# Altium PCB Bus_and_display (1).PcbDoc
Units mm, origin at the board's own origin, x right, y up, seen from the top; angles counter-clockwise.
Board outline 55.88 x 73.79 mm, 2 copper layers (Top Layer, Bottom Layer); 11 components, 7 nets, 112 pads, 3 vias.
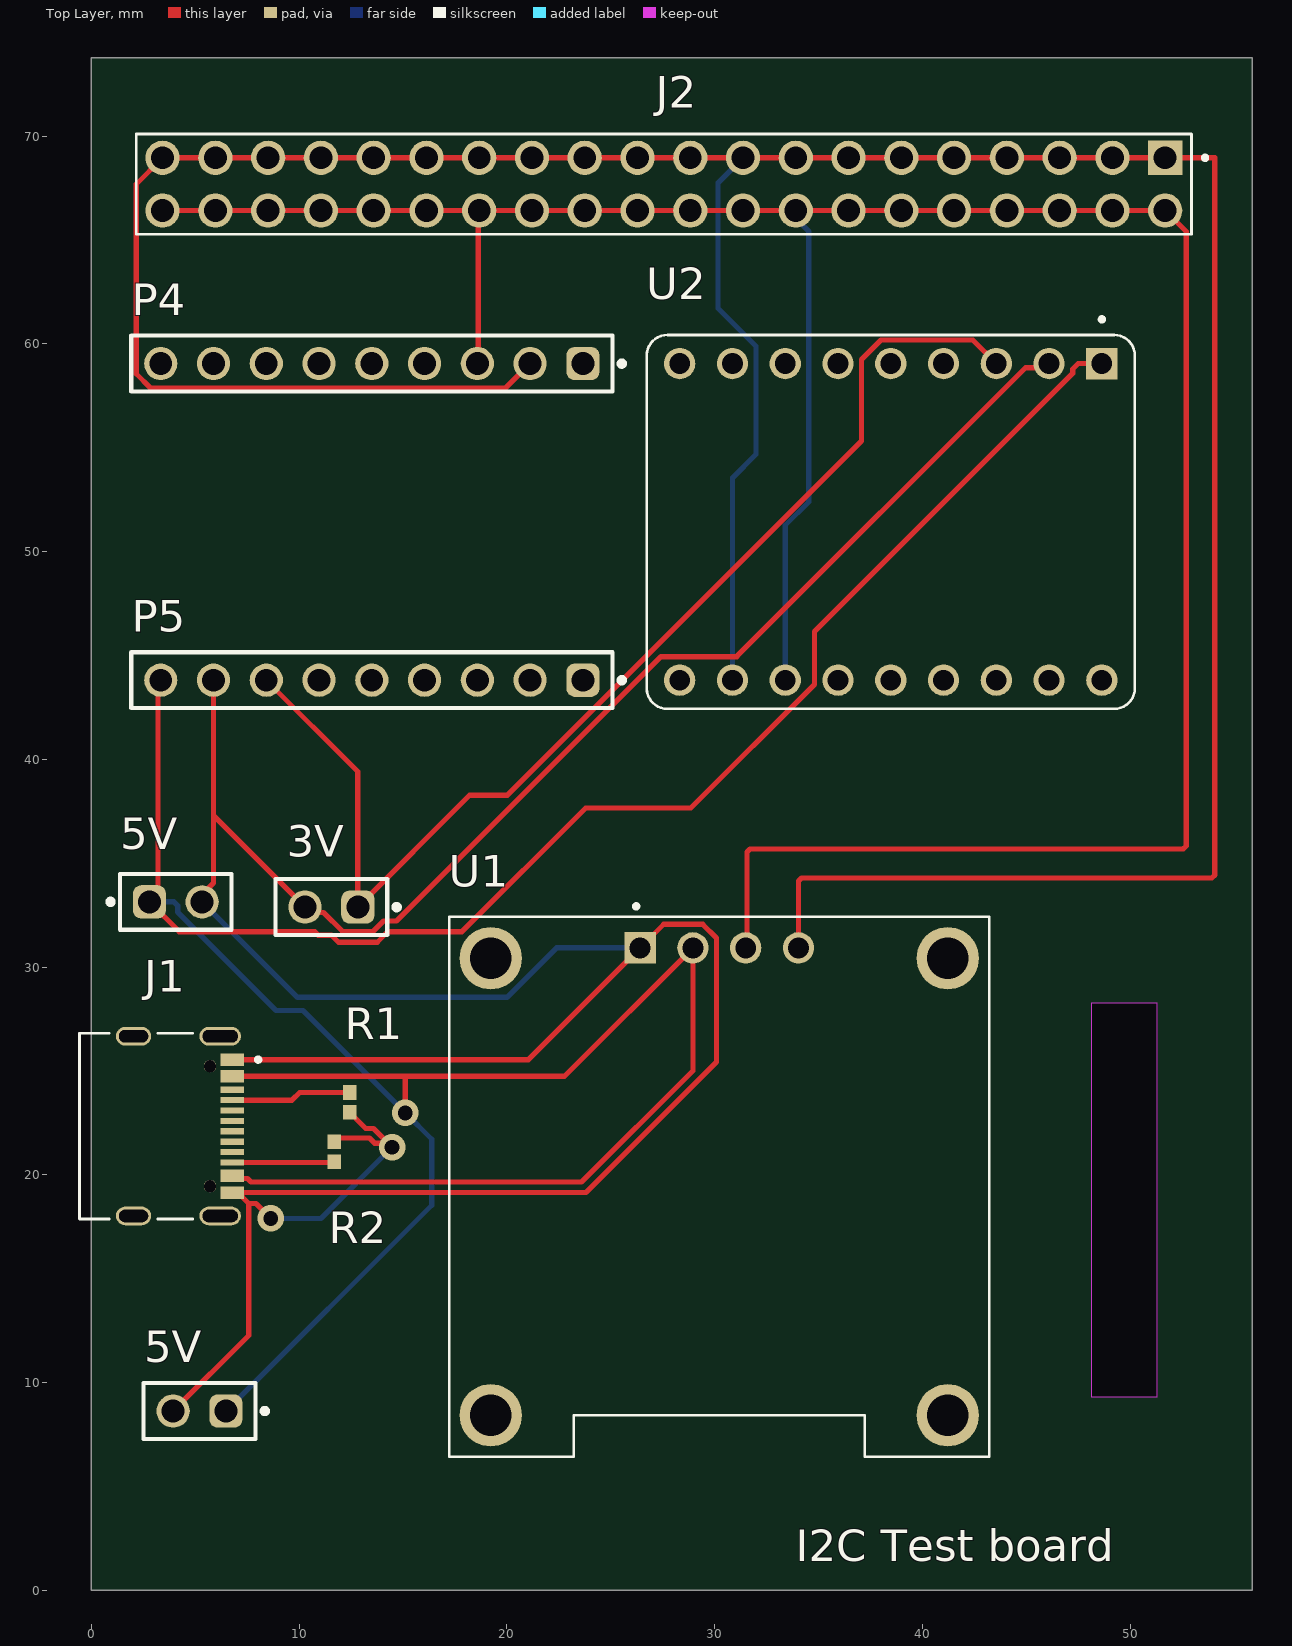
[diagram p0: Top Layer view]
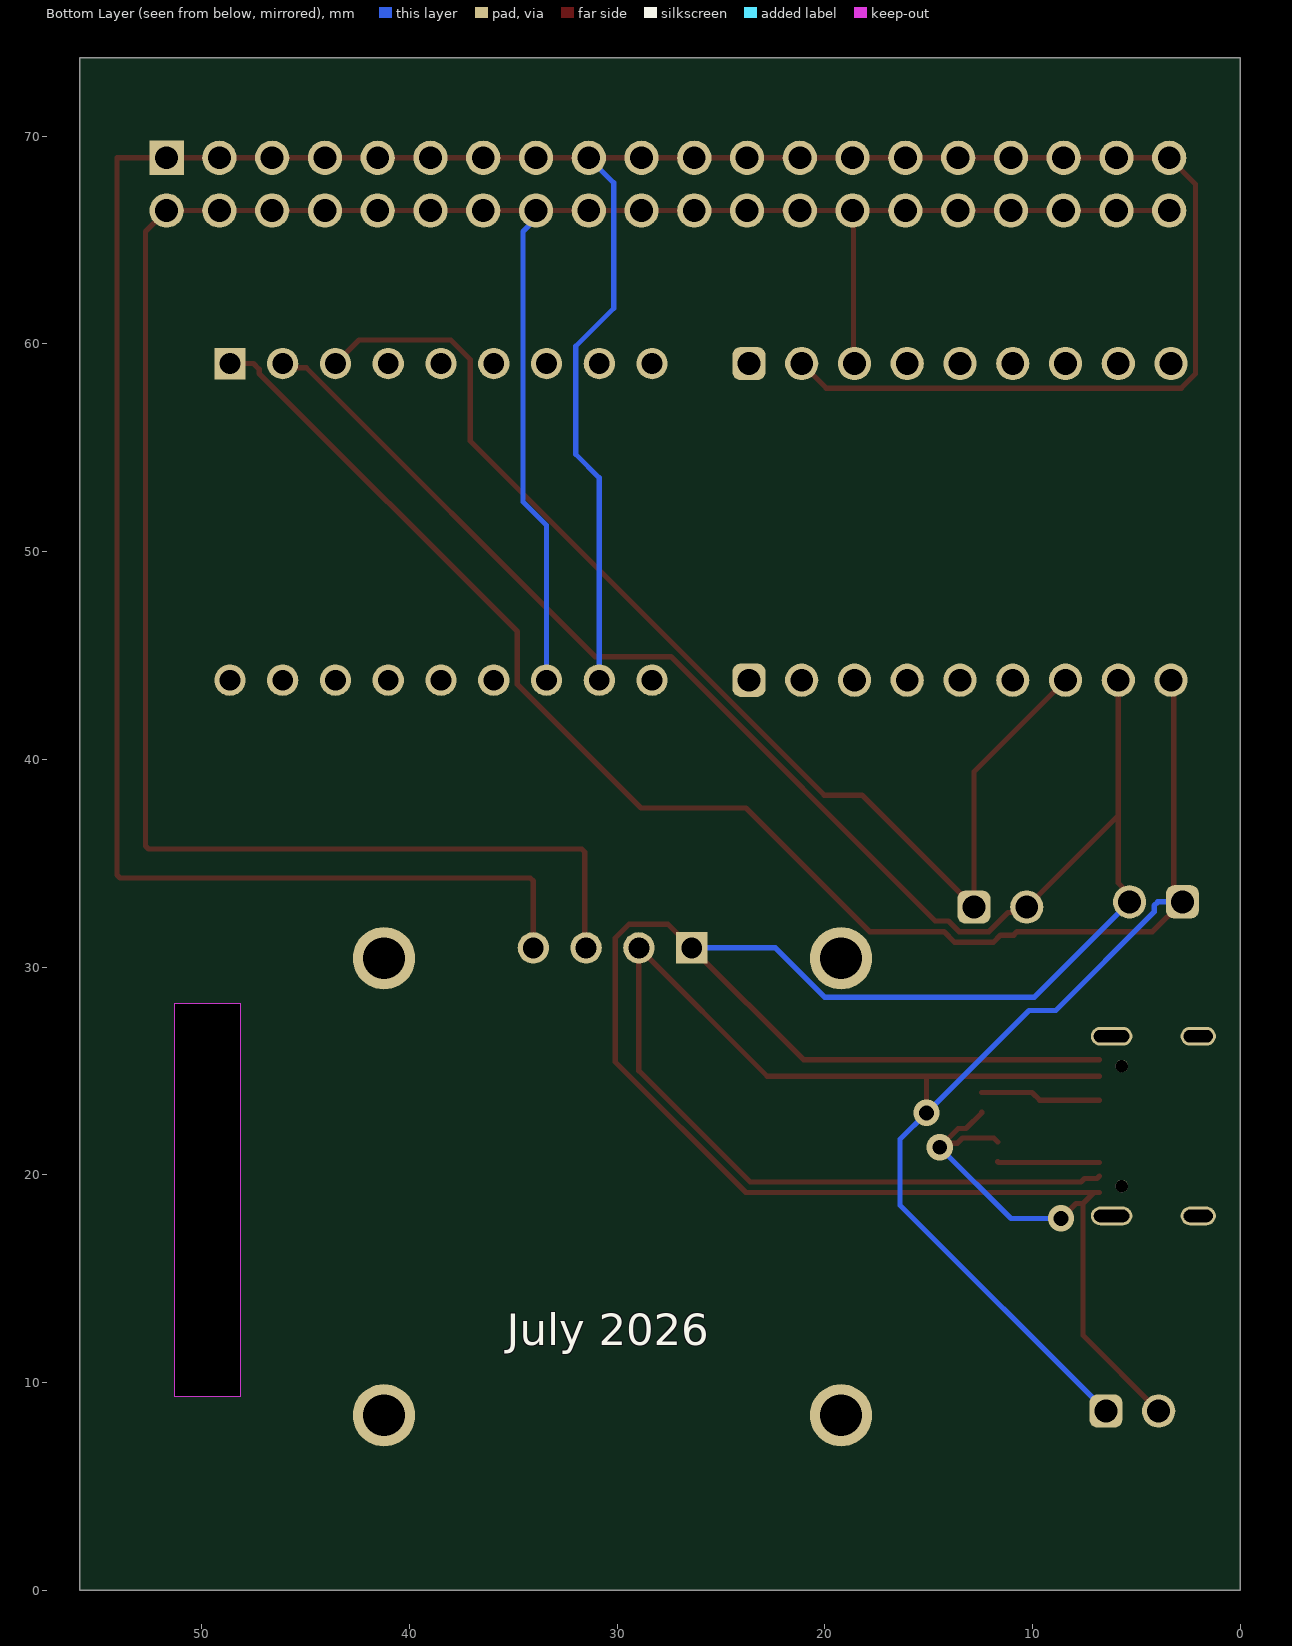
[diagram p1: Bottom Layer view, seen from below]
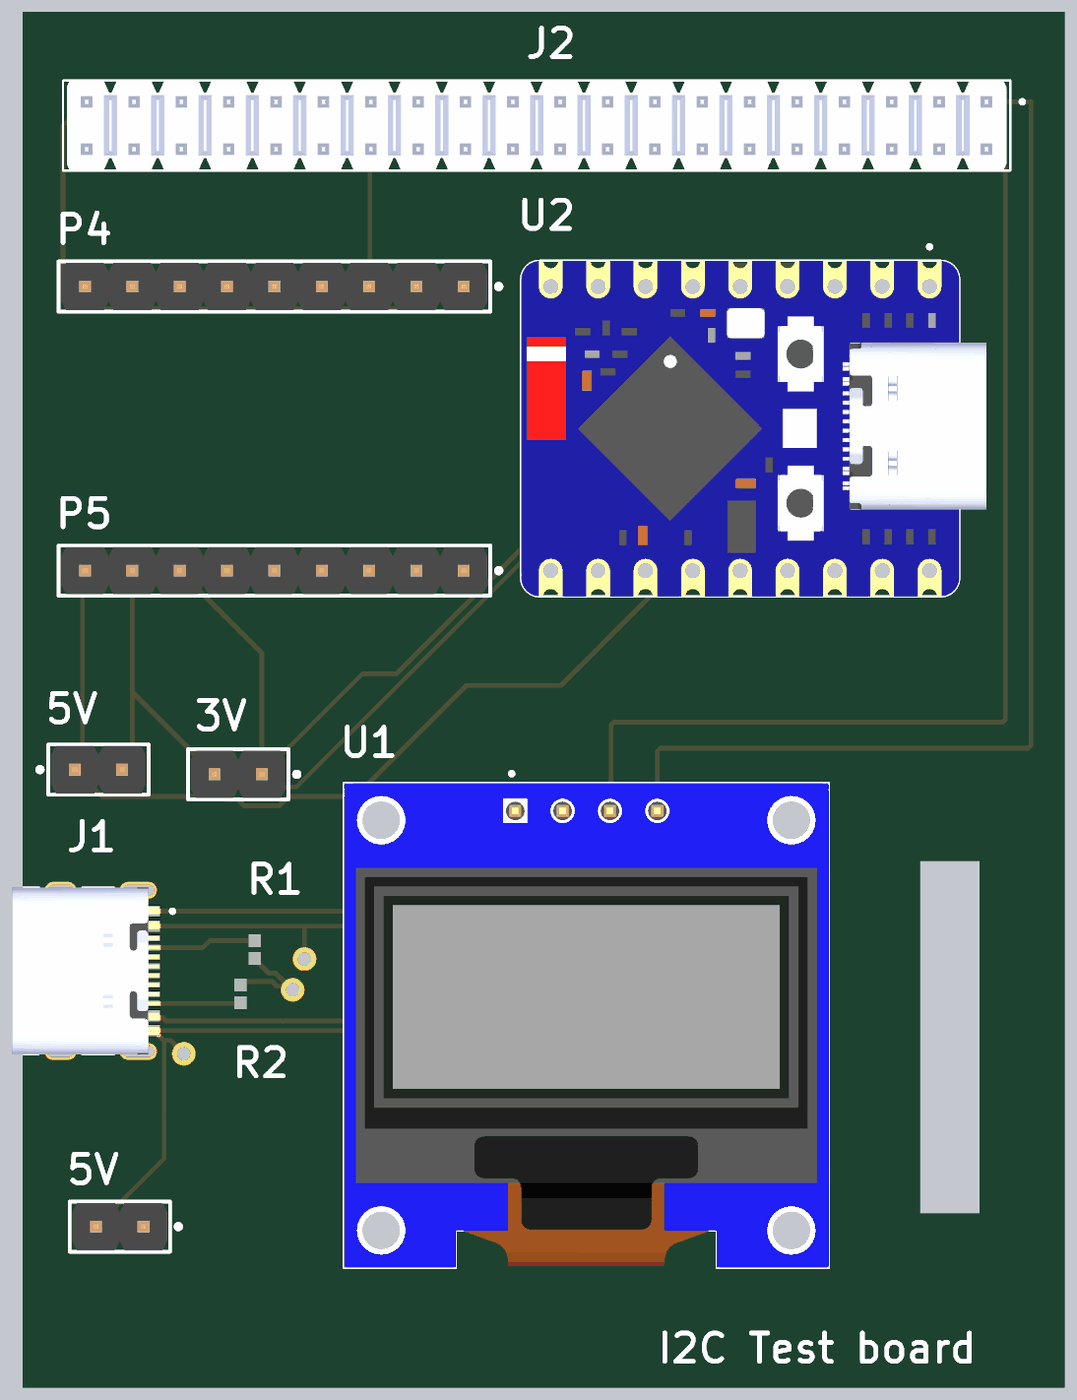
[diagram p2: 3D render of the assembled board from above, using the file's embedded part models]

## Layer stack, top to bottom
Top Solder: solder mask 0.0102, Solder Resist, Dk 3.5
Top Layer: signal copper 0.0356
Dielectric 1: dielectric 0.32, FR-4, Dk 4.8
Bottom Layer: signal copper 0.0356
Bottom Solder: solder mask 0.0102, Solder Resist, Dk 3.5

## Board outline
0,0 55.88,0 55.88,73.787 0,73.787
cut-out: 48.133,28.258 48.133,9.335 51.308,9.335 51.308,28.258

## Design rules (kind name [scope] priority, off if disabled: settings)
Clearance [All] p1: gap=0.254 ignorepadtopadclearanceinfootprint=FALSE
PolygonConnect [All] p1: connectstyle=Relief reliefconductorwidth=0.254 reliefentries=4 polygonreliefangle="90 Angle" airgapwidth=0.254
RoutingVias [All] p1: holewidth=0.711 width=1.27 viastyle="Through Hole" minholewidth=0.711 minwidth=1.27 maxholewidth=0.711 maxwidth=1.27
SolderMaskExpansion [All] p1: expansion=0 istentingtop=FALSE
SupplyNets "Schematic Supply Nets" [InNet('GND')] p1: voltage=0.000
Width [All] p1: maxlimit=0.254 minlimit=0.254 preferedwidth=0.254
30 further rules are at their usual default settings.

## Classes and differential pairs
component class Bus_and_display: 3V 5V J1 P4 P5 R1 R2 U1 U2

## Components (designator, comment, footprint, x,y, rotation, side; value= is the part's Value field where it differs from the comment)
3V "61300211121" 61300211121 11.557,32.893 r180 top (schematic designator P3)
5V "61300211121" 61300211121 4.064,33.147 r0 top (schematic designator P2)
5V "61300211121" 61300211121 5.207,8.636 r180 top (schematic designator P1)
J1 "TYPE-C-31-M-12" HRO_TYPE-C-31-M-12 2.032,22.352 r270 top
J2 "77313-101-40LF" AMPHENOL_77313-101-40LF 27.559,67.691 r180 top
P4 "61300911121" 61300911121 13.5,59.055 r180 top
P5 "61300911121" 61300911121 13.5,43.815 r180 top
R1 "RC0402JR-075K1L" RESC1005X40X25ML05T10 12.446,23.495 r90 top
R2 "RC0402JR-075K1L" RESC1005X40X25ML05T10 11.684,21.115 r90 top
U1 "DM-OLED096-636" MODULE_DM-OLED096-636 30.226,19.431 r0 top
U2 "ESP32-S3-ZERO" MODULE_ESP32-S3-ZERO 38.481,51.435 r270 top

## Footprints (in the part's own frame and the unit in brackets; to place one, negate y for a bottom-side part, rotate by r counter-clockwise, add the part's x,y. Pads: shape width x height; smd on the part's side, far side on the other; paste and mask are expansions set on the pad)
61300211121 [mm] "Pin Header, pitch 2.54 mm, THT, Vertical, single row, 2p"
  rrect50% 1.6x1.6 hole 1.1: 1(-1.27,0)
  round 1.6 hole 1.1: 2(1.27,0)
  silkscreen extent -3.26,-1.35 2.69,1.35, body extent -2.54,-1.27 2.54,1.27, height 8.57
61300911121 [mm] "Pin Header, pitch 2.54 mm, THT, Vertical, single row, 9p"
  rrect50% 1.6x1.6 hole 1.1: 1(-10.16,0)
  round 1.6 hole 1.1: 2(-7.62,0) 3(-5.08,0) 4(-2.54,0) 5(0,0) 6(2.54,0) 7(5.08,0) 8(7.62,0) 9(10.16,0)
  silkscreen extent -12.15,-1.35 11.58,1.35, body extent -11.43,-1.27 11.43,1.27, height 8.57
AMPHENOL_77313-101-40LF [mm]
  rect 1.65x1.65 / inner round 1.65 / far side rect 1.65x1.65 hole 1.1: 01(-24.13,-1.27)
  round 1.65 hole 1.1: 02(-24.13,1.27) 03(-21.59,-1.27) 04(-21.59,1.27) 05(-19.05,-1.27) 06(-19.05,1.27) 07(-16.51,-1.27) 08(-16.51,1.27) 09(-13.97,-1.27) 10(-13.97,1.27) 11(-11.43,-1.27) 12(-11.43,1.27) 13(-8.89,-1.27) 14(-8.89,1.27) 15(-6.35,-1.27) 16(-6.35,1.27) 17(-3.81,-1.27) 18(-3.81,1.27) 19(-1.27,-1.27) 20(-1.27,1.27) 21(1.27,-1.27) 22(1.27,1.27) 23(3.81,-1.27) 24(3.81,1.27) 25(6.35,-1.27) 26(6.35,1.27) 27(8.89,-1.27) 28(8.89,1.27) 29(11.43,-1.27) 30(11.43,1.27) 31(13.97,-1.27) 32(13.97,1.27) 33(16.51,-1.27) 34(16.51,1.27) 35(19.05,-1.27) 36(19.05,1.27) 37(21.59,-1.27) 38(21.59,1.27) 39(24.13,-1.27) 40(24.13,1.27)
  silkscreen extent -26.15,-2.41 25.4,2.41, body extent -25.2,-2.41 25.2,2.41, height 8.37
HRO_TYPE-C-31-M-12 [mm]
  rect 0.6x1.14 smd mask+0.05: A1_B12(-3.2,4.75) A4_B9(-2.4,4.75) B1_A12(3.2,4.75) B4_A9(2.4,4.75)
  rect 0.3x1.14 smd mask+0.05: A5(-1.25,4.75) A6(-0.25,4.75) A7(0.25,4.75) A8(1.25,4.75) B5(1.75,4.75) B6(0.75,4.75) B7(-0.75,4.75) B8(-1.75,4.75)
  oval 0.9x2 hole 0.6 slot 1.7 at 90 deg: S1(-4.325,4.17) S2(4.325,4.17)
  oval 0.9x1.7 hole 0.6 slot 1.4 at 90 deg: S3(-4.325,0) S4(4.325,0)
  round 0.6 hole 0.6 unplated: ""(-2.89,3.68) ""(2.89,3.68)
  silkscreen extent -4.47,-2.6 4.47,6.1, body extent -4.47,-2.6 4.47,5.31, height 3.31
MODULE_DM-OLED096-636 [mm]
  rect 1.508x1.508 / inner round 1.508 / far side rect 1.508x1.508 hole 1: 1(-3.81,11.5)
  round 1.508 hole 1: 2(-1.27,11.5) 3(1.27,11.5) 4(3.81,11.5)
  round 3 hole 2: S1(-11,11) S2(11,11) S3(11,-11) S4(-11,-11)
  silkscreen extent -13,-13 13,13.6, body extent -13,-13 13,13, height 5.66
MODULE_ESP32-S3-ZERO [mm]
  round 1.508 hole 1 mask+0.102: 1(-7.62,2.54) 2(-7.62,0) 3(-7.62,-2.54) 3V3(-7.62,5.08) 4(-7.62,-5.08) 5(-7.62,-7.62) 6(-7.62,-10.16) 7(7.62,-10.16) 8(7.62,-7.62) 9(7.62,-5.08) 10(7.62,-2.54) 11(7.62,0) 12(7.62,2.54) 13(7.62,5.08) GND(-7.62,7.62) RX(7.62,7.62) TX(7.62,10.16)
  rect 1.508x1.508 / inner round 1.508 / far side rect 1.508x1.508 hole 1 mask+0.102: 5V(-7.62,10.16)
  silkscreen extent -9.85,-11.75 9,11.75, body extent -9,-11.75 9,13.2, height 4.88
RESC1005X40X25ML05T10 [mm] "Chip Resistor, 2-Leads, Body 1.00x0.50mm, IPC Low Density"
  rect 0.7x0.65 smd: 1(-0.475,0) 2(0.475,0)
  body extent -0.53,-0.27 0.53,0.28, height 0.4

## Part data
3V 5V 5V: library part CMP-1712-00002-7, "THT Vertical Pin Header WR-PHD, Pitch 2.54 mm, Single Row, 2 pins", Color=Black, Contact Resistance=20mΩ, Current Rating=3A, Max Operating Temperature=105°C, Min Operating Temperature=-40°C, Operating Supply Voltage=250V, Connector Type="Male Pin", Contact Gender=Male, Contact Material=Gold, Contact Mating Length=5.9944mm, Contact Plating=Gold, Gender=Male, Height=8.94mm, Housing Material=PBT, Lead Free="Lead Free", Lead Pitch=2.54mm, Mount="Through Hole", Number Of Contacts=2, Number of Pins=2, Number of Positions=2, Number of Rows=1, Orientation=Vertical, Packaging=Bulk, Pitch=2.54mm, REACH SVHC=No, RoHS=Compliant, Termination="Through Hole", Voltage Rating=250V
J1: "USB Connectors 24 Receptacle 1 8.94*7.3mm RoHS", Package=Package, Check_prices=https://www.snapeda.com/parts/TYPE-C-31-M-12/HRO+Electronics+Co.%252C+Ltd./view-part/?ref=eda, MF="HRO Electronics Co., Ltd.", MP=TYPE-C-31-M-12, SnapEDA_Link=https://www.snapeda.com/parts/TYPE-C-31-M-12/HRO+Electronics+Co.%252C+Ltd./view-part/?ref=snap
J2: "BergStik, Board to Board connector, Unshrouded Header, 2.54 mm Pitch, Vertical, Double Row,Through Hole, 40 Positions", Package=None, Check_prices=https://www.snapeda.com/parts/77313-101-40LF/Amphenol/view-part/?ref=eda, MF=Amphenol, MP=77313-101-40LF, SnapEDA_Link=https://www.snapeda.com/parts/77313-101-40LF/Amphenol/view-part/?ref=snap
P4 P5: library part CMP-1502-01080-4, "THT Vertical Pin Header WR-PHD, Pitch 2.54 mm, Single Row, 9 pins", Color=Black, Contact Resistance=20mΩ, Current Rating=3A, Operating Supply Voltage=250V, Connector Type="Male Pin", Contact Material=Copper, Contact Mating Length=5.9944mm, Contact Plating=Gold, Gender=Male, Lead Pitch=2.54mm, Mount="Through Hole", Number Of Contacts=9, Number of Pins=9, Number of Positions=9, Number of Rows=1, Orientation=Vertical, Packaging=Bulk, Pitch=2.54mm, RoHS=Compliant, Termination=Solder
R1 R2: library part CMP-2002-08025-1, Manufacturer="Yageo / Phycomp", Part Number=RC0402JR-075K1L
U1: "0.96â€ 128 X 64 MONOCHROME GRAPHIC OLED DISPLAY MODULE - I2C", Package=Package, Check_prices=https://www.snapeda.com/parts/DM-OLED096-636/Display+Module/view-part/?ref=eda, MF="Display Module", MP=DM-OLED096-636, SnapEDA_Link=https://www.snapeda.com/parts/DM-OLED096-636/Display+Module/view-part/?ref=snap
U2: "ESP32-S3 Mini Development Board, Based on ESP32-S3FH4R2 Dual-Core Processor, 240MHz Running Frequency, 2.4GHz Wi-Fi & Bluetooth 5", Package=None, Check_prices=https://www.snapeda.com/parts/ESP32-S3-Zero/Waveshare+Electronics/view-part/?ref=eda, MF="Waveshare Electronics", MP=ESP32-S3-Zero, SnapEDA_Link=https://www.snapeda.com/parts/ESP32-S3-Zero/Waveshare+Electronics/view-part/?ref=snap

## Via types
v1: diameter 1.27, hole 0.711, Top Layer to Bottom Layer, 3 vias

## Nets (pads, with @x,y where several pads share a name; then routed paths per layer and width w, separated by ;. In a path a pad name is that pad's centre, name@x,y a point inside that pad or via, vN(x,y) a via of type N, cw(c..) or ccw(c..) an arc to the next point about the centre after c; other vN are vias at no path point)
3V: 3V.1 P5.7 U2.3V3 | length 57.6
  Top Layer w0.254: P5.7 12.827,39.408 3V.1 18.215,38.281 20.031,38.281 37.076,55.326 37.076,59.255 38.011,60.19 42.426,60.19 U2.3V3
5V: 5V.1 J1.A4_B9 J1.B4_A9 P5.9 U1.2 U2.5V | length 163.3
  Top Layer w0.254: P5.9 3.204,43.679 3.204,33.557 2.794,33.147 4.229,31.712 10.75,31.712 10.918,31.544 11.553,31.544 11.893,31.204 13.761,31.204 14.269,31.712 17.847,31.712 23.798,37.663 28.855,37.663 34.806,43.615 34.806,46.155 47.236,58.585 47.236,58.785 47.506,59.055 U2.5V ; J1.B4_A9 6.901,19.833 7.51,19.833 7.683,19.66 23.597,19.66 28.956,25.019 U1.2 22.777,24.752 15.113,24.752 ; J1.A4_B9 15.113,24.752 ; v1(15.113,22.987) 15.113,24.752
  Bottom Layer w0.254: 5V.1@2.794,33.147 3.975,33.147 4.153,32.969 4.153,32.658 8.891,27.92 10.18,27.92 v1(15.113,22.987) 16.383,21.717 16.383,18.542 5V.1@6.477,8.636
GND: 3V.2 5V.2 J1.A1_B12 J1.B1_A12 P5.8 R1.1 R2.2 U1.1 U2.GND | length 173.4
  Top Layer w0.254: 5V.2@3.937,8.636 7.583,12.282 7.583,18.621 ; 5V.2@5.461,33.02 5.334,33.147 5.334,33.511 5.88,34.057 5.88,37.3 ; P5.8 5.88,37.3 ; J1.B1_A12 J1.B1_A12@7.052,19.152 ; J1.A1_B12 21.037,25.552 U1.1 27.551,32.066 29.426,32.066 30.091,31.401 30.091,25.436 23.807,19.152 J1.B1_A12@7.052,19.152 ; v1(8.636,17.907) 7.918,18.625 7.579,18.625 J1.B1_A12@7.052,19.152 ; R2.2 11.872,21.778 13.38,21.778 13.628,21.53 v1@14.284,21.53 ; R1.1 12.446,22.995 13.209,22.232 13.582,22.232 v1@14.284,21.53 ; v1(14.478,21.336) v1@14.284,21.53 ; U2.GND 45.901,58.855 44.966,58.855 31.061,44.95 27.418,44.95 14.688,32.22 14.059,32.22 13.551,31.712 12.103,31.712 11.18,32.635 10.545,32.635 3V.2 5.88,37.3
  Bottom Layer w0.254: 5V.2@5.334,33.147 9.931,28.55 20.005,28.55 22.386,30.931 U1.1 ; v1(8.636,17.907) 11.049,17.907 v1(14.478,21.336)
NetJ1_A5: J1.A5 R1.2 | length 5.8
  Top Layer w0.254: J1.A5 9.662,23.602 10.03,23.97 R1.2
NetJ1_B5: J1.B5 R2.1 | length 4.9
  Top Layer w0.254: J1.B5 11.646,20.602 R2.1
SCL: J2.02 J2.04 J2.06 J2.08 J2.10 J2.12 J2.14 J2.16 J2.18 J2.20 J2.22 J2.24 J2.26 J2.28 J2.30 J2.32 J2.34 J2.36 J2.38 J2.40 P4.3 U1.3 U2.9 | length 136
  Top Layer w0.254: J2.40 J2.38 J2.36 J2.34 J2.32 J2.30 J2.28 ; P4.3 18.625,59.1 18.625,66.377 J2.28 ; J2.18@31.305,66.358 J2.18 ; U1.3 31.559,30.994 31.559,35.538 31.708,35.687 52.556,35.687 52.705,35.836 52.705,65.405 J2.02 J2.04 J2.06 J2.08 J2.10 J2.12 J2.14 J2.16 J2.18 ; J2.28 J2.26 J2.24 J2.22 J2.20 J2.18
  Bottom Layer w0.254: U2.9 33.401,51.272 34.536,52.407 34.536,65.416 33.909,66.043 J2.16
SDA: J2.01 J2.03 J2.05 J2.07 J2.09 J2.11 J2.13 J2.15 J2.17 J2.19 J2.21 J2.23 J2.25 J2.27 J2.29 J2.31 J2.33 J2.35 J2.37 J2.39 P4.2 U1.4 U2.8 | length 166.1
  Top Layer w0.254: P4.2 19.939,57.874 2.851,57.874 2.159,58.566 2.159,67.691 J2.39 J2.37 J2.35 J2.33 J2.31 J2.29 J2.27 J2.25 J2.23 J2.21 J2.19 J2.17 J2.15 J2.13 J2.11 J2.09 J2.07 J2.05 J2.03 J2.01 54.08,68.961 54.08,34.439 53.931,34.29 34.185,34.29 34.036,34.141 U1.4
  Bottom Layer w0.254: U2.8 30.861,53.554 31.996,54.689 31.996,59.888 30.163,61.721 30.163,67.755 J2.17
pads on no net: J1. J1.A6 J1.A7 J1.A8 J1.B6 J1.B7 J1.B8 J1.S1 J1.S2 J1.S3 J1.S4 P4.1 P4.4 P4.5 P4.6 P4.7 P4.8 P4.9 P5.1 P5.2 P5.3 P5.4 P5.5 P5.6 U1.S1 U1.S2 U1.S3 U1.S4 U2.1 U2.2 U2.3 U2.4 U2.5 U2.6 U2.7 U2.10 U2.11 U2.12 U2.13 U2.RX U2.TX

## Silkscreen, mask and mechanical layers (free items; w line width, h text height)
Top Overlay:
  text "I2C Test board" at 33.909,1.397 h1.52
Bottom Overlay:
  text "July 2026" at 35.306,11.811 h1.52

## Text inside footprints (layer, text, board x,y; h text height)
J1: Mechanical 13 "PCB EDGE" at 0.132,17.152 h0.61 r270